# Altium PCB StepperControllerPCB.PcbDoc
Units mm, origin at the board's own origin, x right, y up, seen from the top; angles counter-clockwise.
Board outline 48.64 x 60.07 mm, 2 copper layers (Top Layer, Bottom Layer); 13 components, 26 nets, 92 pads, 2 vias.
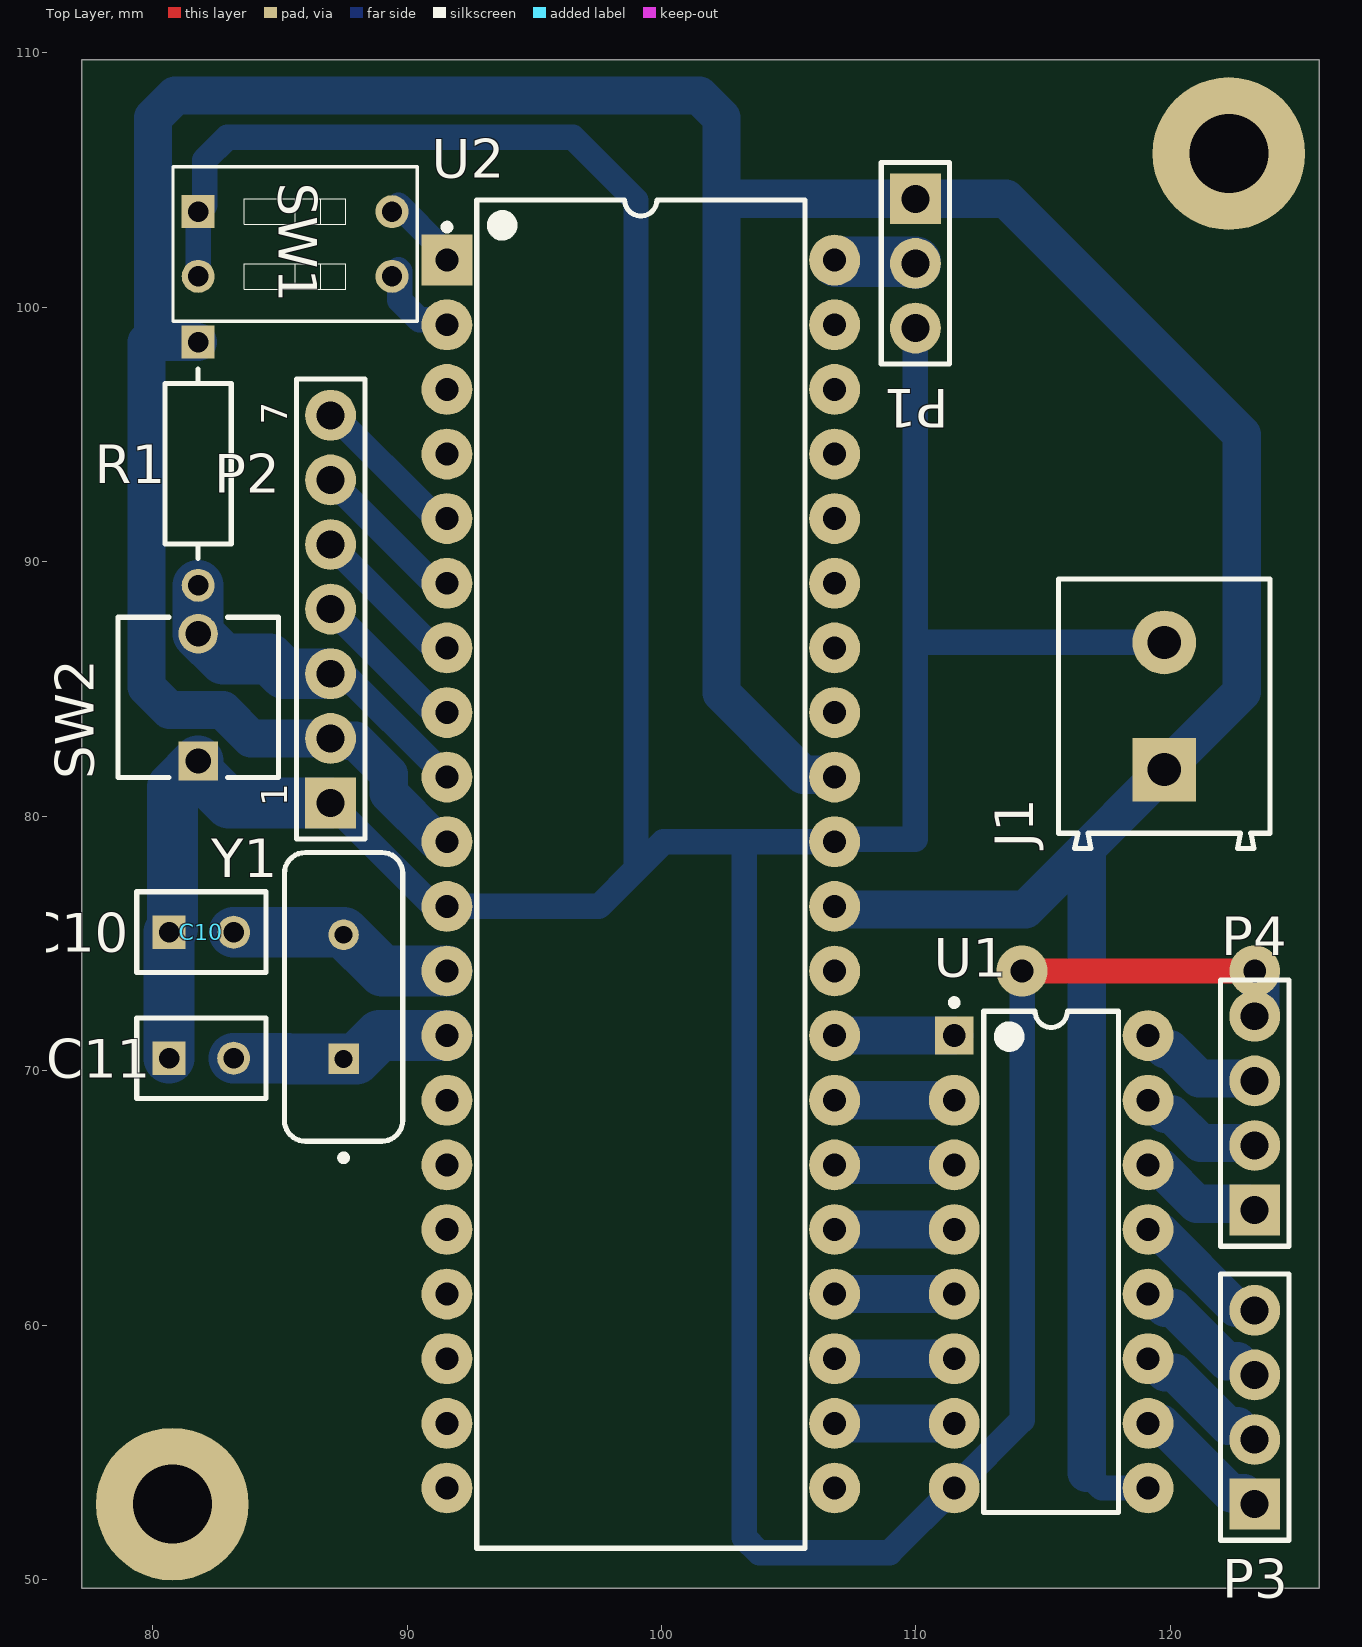
[diagram p0: Top Layer view]
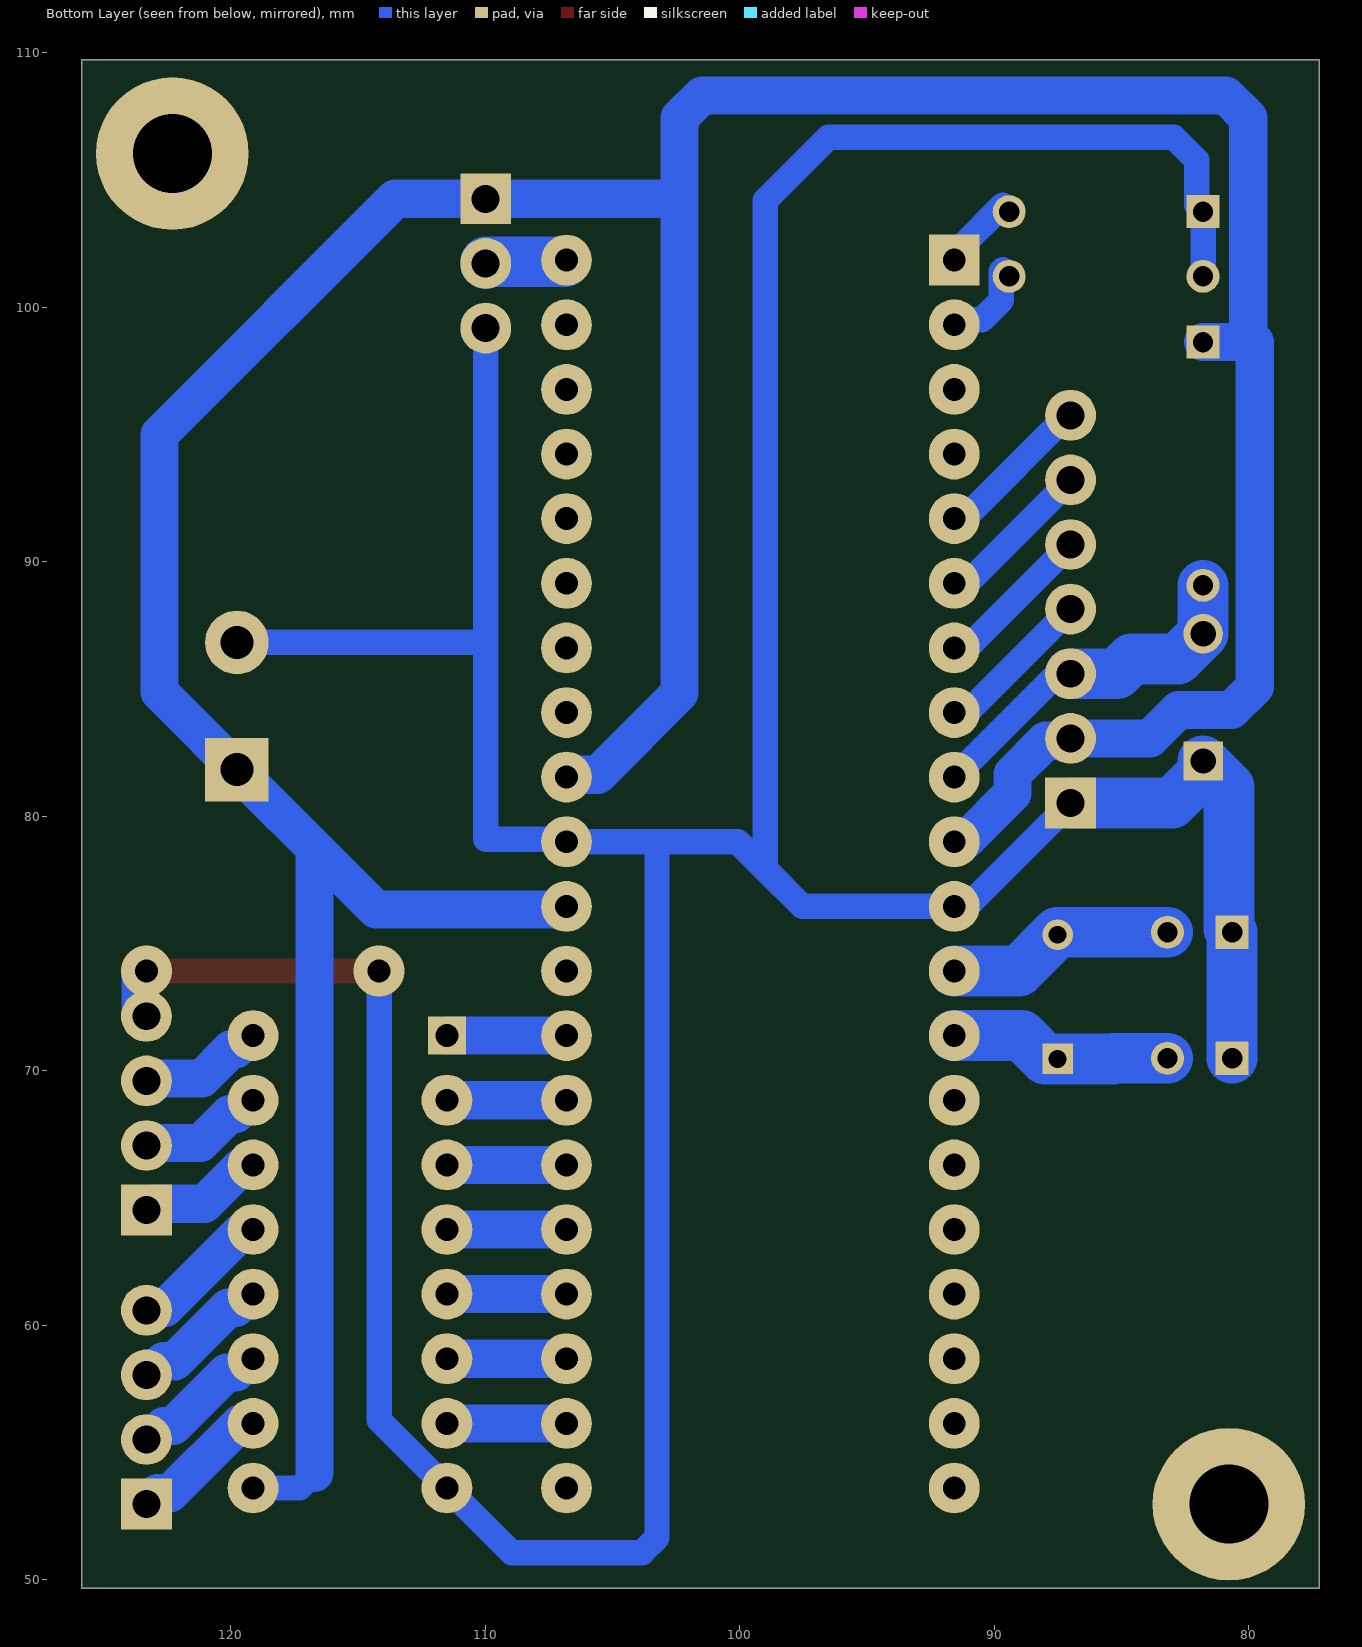
[diagram p1: Bottom Layer view, seen from below]
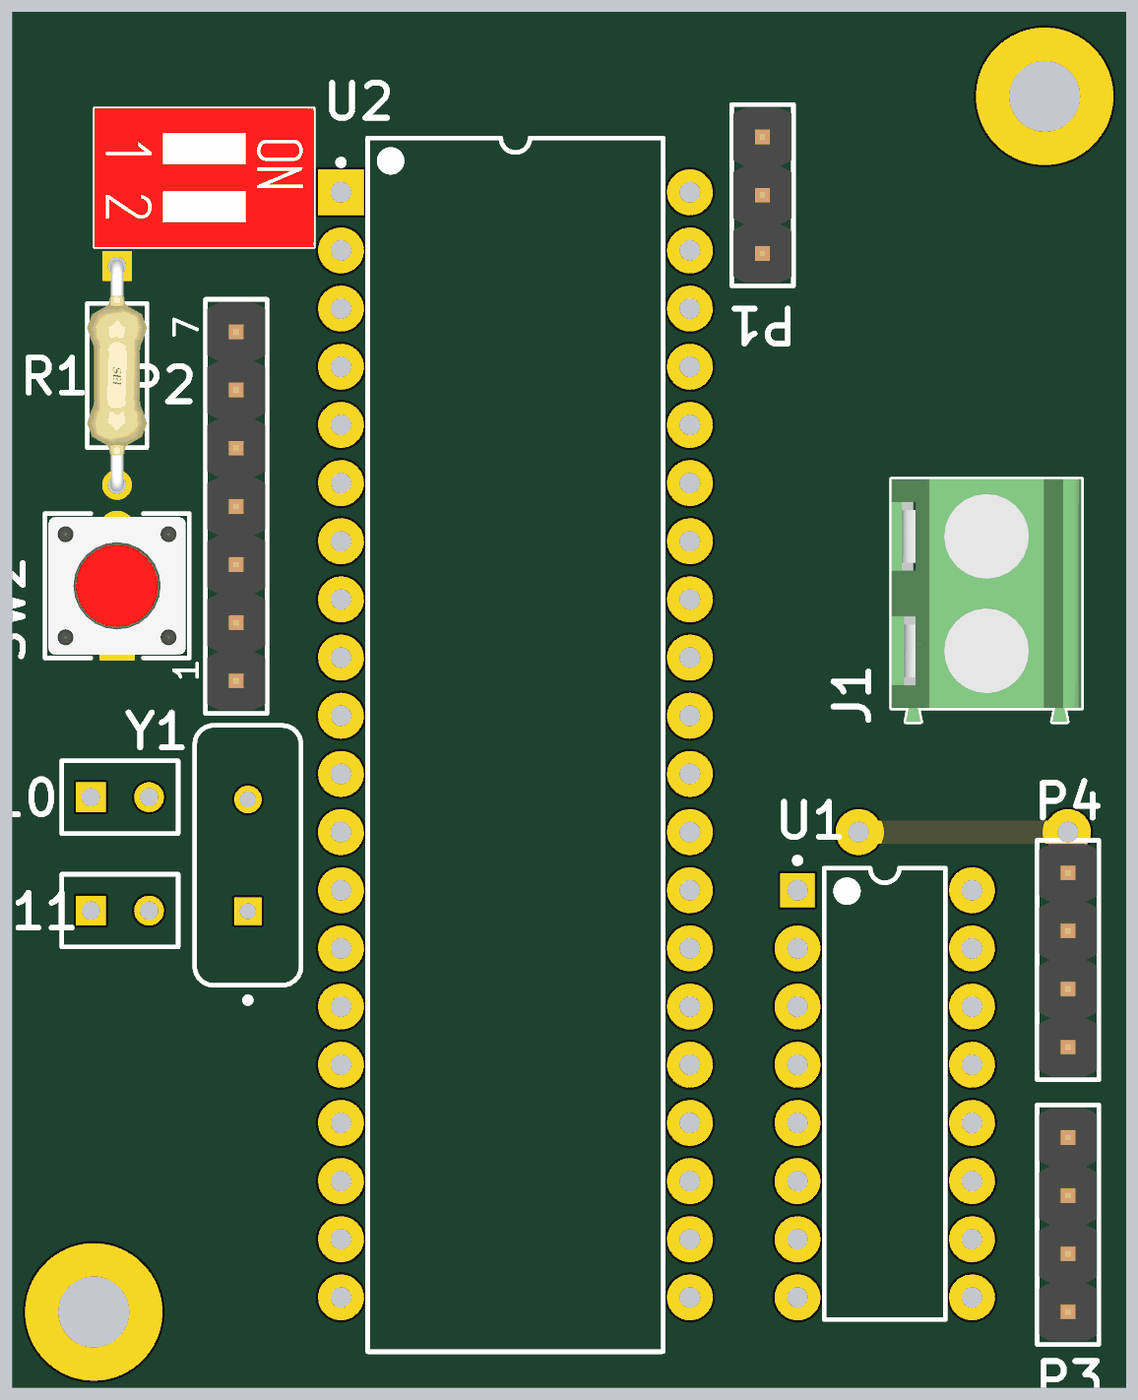
[diagram p2: 3D render of the assembled board from above, using the file's embedded part models]

## Layer stack, top to bottom
Top Solder: solder mask 0.0102, Solder Resist, Dk 3.5
Top Layer: signal copper 0.0356
Dielectric 1: dielectric 0.32, FR-4, Dk 4.8
Bottom Layer: signal copper 0.0356
Bottom Solder: solder mask 0.0102, Solder Resist, Dk 3.5

## Board outline
77.216,49.657 125.857,49.657 125.857,109.728 77.216,109.728

## Design rules (kind name [scope] priority, off if disabled: settings)
Clearance [All] p1: gap=0.254 ignorepadtopadclearanceinfootprint=FALSE except(0: Arc-Hole Track-Hole SMDPad-Hole THPad-Hole Via-Hole Fill-Hole Poly-Hole Region-Hole Text-Hole; 1: Arc-Fill Arc-Poly Arc-Region Track-Fill Track-Poly Track-Region THPad-Fill THPad-Poly THPad-Region)
PlaneClearance [All] p1: clearance=10
PolygonConnect [All] p1: connectstyle=Relief reliefconductorwidth=0.5 reliefentries=4 polygonreliefangle="90 Angle" airgapwidth=0.254
RoutingVias [All] p1: holewidth=0.711 width=1.27 viastyle="Through Hole" minholewidth=0.711 minwidth=1.27 maxholewidth=0.711 maxwidth=1.27
SolderMaskExpansion [All] p1: expansion=0.102 istentingtop=FALSE
Width [All] p1: maxlimit=4 minlimit=1 preferedwidth=3 minimp=50.000000 maximp=50.000000 favimp=50.000000
29 further rules are at their usual default settings.

## Components (designator, comment, footprint, x,y, rotation, side; value= is the part's Value field where it differs from the comment)
C10 "" CAPR51-254-508X318X736 81.915,75.438 r0 top
C11 "" CAPR51-254-508X318X736 81.915,70.485 r0 top
J1 "691213710002" 691213710002 119.761,84.328 r90 top
P1 "61300311121" 61300311121 109.982,101.727 r270 top
P2 "61300711121" 61300711121 86.995,88.138 r90 top
P3 "61300411121" 61300411121 123.317,56.769 r90 top
P4 "61300411121" 61300411121 123.317,68.326 r90 top
R1 "" FP-CF14-MFG 81.788,93.853 r270 top
SW1 "" 418117270902 85.598,102.489 r270 top
SW2 "EVQ-21505R" FP-EVQ-21505R-MFG 81.788,84.669 r90 top
U1 "ULN2003A" STM-DIP-16L 115.316,62.484 r0 top
U2 "ATmega32-16PU" 40P6 99.187,77.724 r0 top
Y1 "" FOX-FOXSLF160-20 87.503,72.898 r90 top

## Footprints (in the part's own frame and the unit in brackets; to place one, negate y for a bottom-side part, rotate by r counter-clockwise, add the part's x,y. Pads: shape width x height; smd on the part's side, far side on the other; paste and mask are expansions set on the pad)
40P6 [mm] "40-Pin Ceramic Dual In-Line Package (CerDIP)"
  rect 2x2 hole 0.9: 1(-7.62,24.13)
  round 2 hole 0.9: 2(-7.62,21.59) 3(-7.62,19.05) 4(-7.62,16.51) 5(-7.62,13.97) 6(-7.62,11.43) 7(-7.62,8.89) 8(-7.62,6.35) 9(-7.62,3.81) 10(-7.62,1.27) 11(-7.62,-1.27) 12(-7.62,-3.81) 13(-7.62,-6.35) 14(-7.62,-8.89) 15(-7.62,-11.43) 16(-7.62,-13.97) 17(-7.62,-16.51) 18(-7.62,-19.05) 19(-7.62,-21.59) 20(-7.62,-24.13) 21(7.62,-24.13) 22(7.62,-21.59) 23(7.62,-19.05) 24(7.62,-16.51) 25(7.62,-13.97) 26(7.62,-11.43) 27(7.62,-8.89) 28(7.62,-6.35) 29(7.62,-3.81) 30(7.62,-1.27) 31(7.62,1.27) 32(7.62,3.81) 33(7.62,6.35) 34(7.62,8.89) 35(7.62,11.43) 36(7.62,13.97) 37(7.62,16.51) 38(7.62,19.05) 39(7.62,21.59) 40(7.62,24.13)
  silkscreen extent -7.74,-26.5 6.45,26.5, body extent -7.05,-26.47 7.05,26.47, height 5.72
61300311121 [mm] "Pin Header, pitch 2.54 mm, THT, Vertical, single row, 3p"
  rect 2x2 hole 1.1: 1(-2.54,0)
  round 2 hole 1.1: 2(0,0) 3(2.54,0)
  silkscreen extent -3.96,-1.35 3.96,1.35, body extent -3.81,-1.27 3.81,1.27, height 8.57
61300411121 [mm] "Pin Header, pitch 2.54 mm, THT, Vertical, single row, 4p"
  rect 2x2 hole 1.1: 1(-3.81,0)
  round 2 hole 1.1: 2(-1.27,0) 3(1.27,0) 4(3.81,0)
  silkscreen extent -5.23,-1.35 5.23,1.35, body extent -5.08,-1.27 5.08,1.27, height 8.57
61300711121 [mm] "Pin Header, pitch 2.54 mm, THT, Vertical, single row, 7p"
  rect 2x2 hole 1.1: 1(-7.62,0)
  round 2 hole 1.1: 2(-5.08,0) 3(-2.54,0) 4(0,0) 5(2.54,0) 6(5.08,0) 7(7.62,0)
  silkscreen extent -9.04,-1.35 9.04,1.35, body extent -8.89,-1.27 8.89,1.27, height 8.57
418117270902 [mm] "02p, 2.54mm Pitch, Horizontal, Box Type, THT, raised Actuator, red, without Tape, Tube"
  rect 1.3x1.3 hole 0.8: 1(-1.27,-3.81)
  round 1.3 hole 0.8: 2(1.27,-3.81) 3(1.27,3.81) 4(-1.27,3.81)
  silkscreen extent -3.04,-4.8 3.04,4.8, body extent -3.04,-4.8 3.04,4.8, height 6.5
691213710002 [mm] "5,00mm - modular - green - Horizontal entry with rising cage clamp -  10,0mm height - 02p"
  rect 2.5x2.5 hole 1.3: 1(-2.5,0)
  round 2.5 hole 1.3: 2(2.5,0)
  silkscreen extent -5.6,-4.15 5,4.15, body extent -5.6,-4.15 5,4.15, height 10.05
CAPR51-254-508X318X736 [mm] "THD, 2-Leads, Body 5.08x3.18mm"
  rect 1.3x1.3 hole 0.8: 1(-1.27,0)
  round 1.3 hole 0.8: 2(1.27,0)
  silkscreen extent -2.54,-1.59 2.54,1.59, body extent -2.54,-1.59 2.54,1.59, height 7.36
FOX-FOXSLF160-20 [mm] "THD, 2-Leads, Body 11.35x4.65mm"
  rect 1.2x1.2 hole 0.7: 1(-2.44,0)
  round 1.2 hole 0.7: 2(2.44,0)
  silkscreen extent -6.45,-2.32 5.68,2.32, body extent -5.67,-2.32 5.68,2.33, height 3.6
FP-CF14-MFG [mm]
  rect 1.3x1.3 hole 0.8 paste-1000 mask+0: 1(-4.78,0)
  round 1.3 hole 0.8 paste-1000 mask+0: 2(4.78,0)
  silkscreen extent -3.73,-1.3 3.73,1.3, body extent -5.53,-1.4 5.53,1.4, height 0.25
FP-EVQ-21505R-MFG [mm]
  rect 1.55x1.55 hole 1 paste-1000 mask+0: A(-2.5,0)
  round 1.55 hole 1 paste-1000 mask+0: B(2.5,0)
  silkscreen extent -3.15,-3.15 3.15,3.15, body extent -3.37,-3.25 3.37,3.25, height 0.25
STM-DIP-16L [mm] "DIP, 16-Leads, Body 19.7x7.1mm, Pitch 2.54mm"
  rect 1.5x1.5 hole 0.9: 1(-3.81,8.89)
  round 2 hole 0.9: 2(-3.81,6.35) 3(-3.81,3.81) 4(-3.81,1.27) 5(-3.81,-1.27) 6(-3.81,-3.81) 7(-3.81,-6.35) 8(-3.81,-8.89) 9(3.81,-8.89) 10(3.81,-6.35) 11(3.81,-3.81) 12(3.81,-1.27) 13(3.81,1.27) 14(3.81,3.81) 15(3.81,6.35) 16(3.81,8.89)
  silkscreen extent -3.93,-9.85 2.65,10.31, body extent -3.95,-9.85 3.95,9.85, height 5.33

## Part data
C10 C11: library part CMP-1664-00004-1, "Radial Leaded Multilayer Ceramic Capacitor, 0.1 uF, +/- 10%, 50 V, -55 to 125 degC, 2-Pin THD, RoHS, Tape and Reel", Case\Package=SOT-23-5, Dropout Voltage="260 mV", Max Input Voltage="8 V", Max Operating Temperature="85 degC", Max Power Dissipation="250 mW", Min Operating Temperature="-40 degC", Output Current="150 mA", Output Voltage="5 V", Package Quantity=3000, ComponentLink1Description="Manufacturer URL", ComponentLink1URL=http://www.kemet.com/, ComponentLink2Description=Datasheet, ComponentLink2URL=http://www.kemet.com/docfinder?Partnumber=C320C104K5R5TA, DatasheetVersion=Dec-15, Height="1.3 mm", Length="3 mm", Mount="Surface Mount", Outputs=1, PackageDescription="2-Pin Through Hole Device, Body 5.08 x 3.18 mm, Pitch 2.54 mm", PackageReference=CAPR51-254-508X318X736, Packaging="Tape and Reel", Pins=5, Radiation Hardening=No, RoHSCompliant=true, Width="1.8 mm"
J1: library part CMP-1502-02526-1, "Serie 213 - 5.00 mm Horizontal Entry Modular with RisingCage Clamp WR-TBL, 2 pin", Manufacturer="Wurth Elektronik", Operating Temperature=-40to105degC, Datasheet URL=http://katalog.we-online.de/em/datasheet/6912137100xx.pdf, Manufacturer URL=http://www.we-online.de, Mounting Technology=THT, Package Reference=691213710002, Packaging=Box, Part Number=691213710002, Pin Number=2, Pitch=5.00mm, Publisher=WurthElektronik
P1: library part CMP-1502-01062-1, "THT Vertical Pin Header WR-PHD, Pitch 2.54 mm, Single Row, 3 pins", Contact Resistance=20mOhm, Manufacturer="Wurth Elektronik", Operating Temperature=-40to105degC, Rated Current=3A, Withstanding Voltage=500VAC, Working Voltage=250VAC, Datasheet URL=https://katalog.we-online.de/em/datasheet/6130xx11121.pdf, Gender=Male, Manufacturer URL=http://www.we-online.de, Mounting Technology=THT, Orientation=Vertical, Package Reference=61300311121, Packaging=Bag, Part Number=61300311121, Pin Number=3, Pitch=2.54mm, Publisher=WurthElektronik, Row Number=Single
P2: library part CMP-1502-01074-1, "THT Vertical Pin Header WR-PHD, Pitch 2.54 mm, Single Row, 7 pins", Contact Resistance=20mOhm, Manufacturer="Wurth Elektronik", Operating Temperature=-40to105degC, Rated Current=3A, Withstanding Voltage=500VAC, Working Voltage=250VAC, Datasheet URL=https://katalog.we-online.de/em/datasheet/6130xx11121.pdf, Gender=Male, Manufacturer URL=http://www.we-online.de, Mounting Technology=THT, Orientation=Vertical, Package Reference=61300711121, Packaging=Bag, Part Number=61300711121, Pin Number=7, Pitch=2.54mm, Publisher=WurthElektronik, Row Number=Single
P3 P4: library part CMP-1502-01064-1, "THT Vertical Pin Header WR-PHD, Pitch 2.54 mm, Single Row, 4 pins", Contact Resistance=20mOhm, Manufacturer="Wurth Elektronik", Operating Temperature=-40to105degC, Rated Current=3A, Withstanding Voltage=500VAC, Working Voltage=250VAC, Datasheet URL=https://katalog.we-online.de/em/datasheet/6130xx11121.pdf, Gender=Male, Manufacturer URL=http://www.we-online.de, Mounting Technology=THT, Orientation=Vertical, Package Reference=61300411121, Packaging=Bag, Part Number=61300411121, Pin Number=4, Pitch=2.54mm, Publisher=WurthElektronik, Row Number=Single
R1: library part CMP-26528-000003-1, "RES 7.5K OHM 1/4W 5% AXIAL", Case/Package=Axial, Max Operating Temperature=155°C, Max Power Dissipation=250mW, Min Operating Temperature=-55°C, Resistance=7.5kR, Resistor Type="Carbon Film", Temperature Coefficient=-400ppm/°C, Tolerance=5%, Contact Plating=Tin, Diameter=2.3mm, Features="Flame Retardant Coating", Lead Free="Lead Free", Length=0.256inch, Mount="Through Hole", Number of Terminations=2, Packaging="Tape and Reel", Power Rating=250mW, Radiation Hardening=No, RoHS Compliant=Yes, Series=CF
SW1: library part CMP-1435-00002-1, "WS-DITV 2.54 mm Compact THT Dip Switch with Raised Actuator", Manufacturer="Wuerth Elektronik", PartNumber=418117270902, ComponentLink1Description="Manufacturer URL", ComponentLink1URL=http://www.we-online.com, ComponentLink2Description=Datasheet, ComponentLink2URL=http://katalog.we-online.de/em/datasheet/4181172709xx.pdf, NoPins=4, PackageReference=418117270902
SW2: library part CMP-05618-000118-1, "SWITCH TACTILE SPST-NO 0.02A 15V", Actuator Color=Red, Case/Package=Radial, Contact Current Rating=20mA, Contact Resistance=50mR, Max Operating Temperature=70°C, Max Voltage Rating (DC)=15V, Min Operating Temperature=-20°C, Operating Force=1.6N, Package Quantity=1, Actuator Length=1.6mm, Actuator Type=Standard, Contact Plating=Silver, Current Rating=20mA, Depth=6mm, Electrical Life=100000Cycles, Height=5mm, Illumination Type=Non-Illuminated, Lead Free="Lead Free", Length=6mm, Max Current Rating=20mA, Mechanical Life=100000Cycles, Mount="Through Hole", Orientation=Straight, Packaging="Tape and Reel", Series=EVQ2, Size=6mm, Switch Function=Off-Mom, Switch Travel=0.25mm, Termination="PC Pin", Throw Configuration=SPST, Voltage Rating (DC)=15V, Width=6mm
U1: library part CMP-2000-07351-1, "Seven Darlington Array, 50 V, 0.5 A, -40 to 85 degC, 16-Pin DIP, RoHS, Tube", Collector Emitter Voltage V(br)ceo=50V, DC Collector Current=500mA, DC Current Gain hFE=1000hFE, Manufacturer=STMicroelectronics, Operating Temperature Max=85°C, Output Current=0.5A, Package Description="16-Pin DIP, Body 19.7 x 7.1 mm, Pitch 2.54 mm", Package Reference=DIP-16L, Power Dissipation Pd=-, Transistor Case Style=DIP, Automotive Qualification Standard=-, Datasheet URL=http://www2.st.com/content/ccc/resource/technical/document/datasheet/f3/6e/c8/64/4d/b3/4e/38/CD00001244.pdf/files/CD00001244.pdf/jcr:content/translations/en.CD00001244.pdf, Datasheet Version="Rev. 8, 06/2012", Manufacturer URL=http://www.st.com/, Mounting Technology=ThroughHole, MSL=MSL2-1year, No. of Pins=16Pins, PartNumber=ULN2003A, Product Range=-, SVHC=NoSVHC(17-Dec-2015), Transistor Polarity=NPN, VOUT=50V
U2: library part CMP-0095-00359-1, "8-bit AVR Microcontroller, 4.5-5.5V, 16MHz, 32KB Flash, 1024 Bytes EEPROM, 2KB SRAM, 40-pin PDIP, Industrial Grade (-40°C to 85°C)", Code_JEDEC=MS-011-AC, ComponentLink1Description="Manufacturer URL", ComponentLink1URL=http://www.atmel.com/, ComponentLink2Description="ATmega32(L) Datasheet", ComponentLink2URL=http://atmel.com/dyn/resources/prod_documents/doc2503.pdf, ComponentLink3Description="ATmega32(L) Summary", ComponentLink3URL=http://atmel.com/dyn/resources/prod_documents/2503S.pdf, DatasheetVersion="revQ, Feb-2011", PackageDescription="40-lead (0.600\"/15.24mm Wide) Plastic Dual Inline Package (PDIP)", PackageReference=40P6, PackageVersion="revB, Sep-2001"
Y1: library part CMP-1749-00003-1, "Resistance Weld Thru-Hole Crystal, 16 MHz, -20 to 70 degC, 2-Pin THD, RoHS, Bulk", Case\Package=Axial, Max Operating Temperature="155 degC", Min Operating Temperature="-55 degC", Package Quantity=200, Power Rating="250 mW", Resistance="221 kohm", Tolerance=1%, Voltage Rating="250 V", ComponentLink1Description="Manufacturer URL", ComponentLink1URL=http://www.foxonline.com/, ComponentLink2Description=Datasheet, ComponentLink2URL=http://www.foxonline.com/pdfs/hc49slf.pdf, DatasheetVersion=Mar-15, Length="0.248 inch", Mount="Through Hole", PackageDescription="2-Pin Through Hole Device, Body 11.35 x 4.65 mm", PackageReference=FOXSLF160-20, Packaging=Bulk, RoHSCompliant=true

## Free pads (board coordinates)
  round 6 hole 3.1: 2(80.772,52.959) 2(122.301,106.045)

## Via types
v1: diameter 2, hole 0.9, Top Layer to Bottom Layer, 2 vias

## Nets (pads, with @x,y where several pads share a name; then routed paths per layer and width w, separated by ;. In a path a pad name is that pad's centre, name@x,y a point inside that pad or via, vN(x,y) a via of type N, cw(c..) or ccw(c..) an arc to the next point about the centre after c; other vN are vias at no path point)
+5: J1.1 P1.1 P2.2 R1.1 U1.9 U2.10 U2.30 U2.32 | length 171.5
  Bottom Layer w1: 102.362,104.394 102.489,104.267 ; U2.30 106.903,76.358 107.256,76.358 U2.30@107.288,76.327 ; 116.713,54.18 117.299,53.594 U1.9
  Bottom Layer w1.5: 80.01,98.679 80.01,107.452 80.889,108.331 101.483,108.331 102.362,107.452 102.362,104.394 102.362,84.836 105.568,81.63 106.711,81.63 U2.32 ; R1.1 79.756,98.633 79.756,85.08 80.663,84.173 82.754,84.173 83.869,83.058 P2.2 87.091,82.962 87.971,82.962 89.281,81.652 89.281,80.899 91.09,79.09 91.471,79.09 U2.10 ; 102.489,104.267 P1.1 113.538,104.267 122.809,94.996 122.809,84.876 J1.1@119.286,81.353 ; U2.30@107.288,76.327 114.3,76.327 116.522,78.549 J1.1@119.286,81.313 ; 116.713,54.18 116.713,78.359
Bit1: SW1.4 U2.1 | length 2.9
  Bottom Layer w1: SW1.4@89.662,104.013 91.317,102.358 91.317,102.104 U2.1
Bit2: SW1.3 U2.2 | length 3.5
  Bottom Layer w1: SW1.3@89.662,101.473 89.719,101.416 89.719,100.273 90.487,99.505 91.376,99.505 U2.2
GND: C10.1 C11.1 J1.2 P1.3 P2.1 P4.4 SW1.1 SW1.2 SW2.A U1.8 U2.11 U2.31 | length 192
  Top Layer w1: v1(114.173,73.914) v1(123.317,73.914)
  Bottom Layer w1: SW1.2 SW1.1 ; SW1.1@82.042,104.013 82.042,105.791 82.931,106.68 96.52,106.68 98.996,104.203 98.996,77.915 ; P2.1@86.741,80.772 91.059,76.454 U2.11 97.536,76.454 98.996,77.915 ; P1.3 109.982,86.995 ; v1(114.173,73.914) 114.173,56.261 U1.8 108.966,51.054 103.837,51.054 103.251,51.64 103.251,78.74 102.997,78.994 ; J1.2 110.149,86.828 109.982,86.995 ; 98.996,77.915 100.076,78.994 102.997,78.994 ; 102.997,78.994 U2.31 106.903,79.09 109.982,79.09 109.982,86.995
  Bottom Layer w1.5: P4.4 123.317,72.163 123.549,72.395 123.549,73.682 v1(123.317,73.914)
  Bottom Layer w2: C11.1 C10.1 80.772,75.565 80.772,81.153 SW2.A ; SW2.A@82.078,81.443 83.004,80.518 P2.1
NetC10_2: C10.2 U2.12 Y1.2 | length 9
  Bottom Layer w2: C10.2 87.503,75.438 89.027,73.914 U2.12
NetC11_2: C11.2 U2.13 Y1.1 | length 8.8
  Bottom Layer w2: C11.2 85.317,70.485 85.344,70.458 87.998,70.458 88.914,71.374 U2.13
NetP1_2: P1.2 U2.40 | length 3.2
  Bottom Layer w1: U2.40 U2.40@106.87,101.79
  Bottom Layer w2: U2.40@106.87,101.79 P1.2@109.982,101.79
NetP2_3: P2.3 R1.2 SW2.B U2.9 | length 13.9
  Bottom Layer w1: P2.3@87.249,85.852 U2.9
  Bottom Layer w2: R1.2 SW2.B 82.78,86.177 84.598,86.177 85.177,85.598 P2.3
NetP2_4: P2.4 U2.8 | length 6.1
  Bottom Layer w1: P2.4@87.11,88.023 90.963,84.17 91.471,84.17 U2.8
NetP2_5: P2.5 U2.7 | length 6.3
  Bottom Layer w1: P2.5 90.868,86.805 91.376,86.805 U2.7
NetP2_6: P2.6 U2.6 | length 6.3
  Bottom Layer w1: P2.6 90.963,89.25 91.471,89.25 U2.6
NetP2_7: P2.7 U2.5 | length 6.3
  Bottom Layer w1: P2.7@86.995,95.885 91.09,91.79 91.471,91.79 U2.5
NetP3_1: P3.1 U1.10 | length 5.5
  Bottom Layer w1.5: U1.10 119.642,56.134 122.39,53.386 122.89,53.386 P3.1
NetP3_2: P3.2 U1.11 | length 5.5
  Bottom Layer w1.5: U1.11 119.261,58.674 119.797,58.138 120.162,58.138 122.265,56.035 122.646,56.035 123.182,55.499 P3.2
NetP3_3: P3.3 U1.12 | length 5.5
  Bottom Layer w1.5: U1.12 119.261,61.214 119.797,60.678 120.102,60.678 122.205,58.575 122.646,58.575 123.182,58.039 P3.3
NetP3_4: P3.4 U1.13 | length 5.5
  Bottom Layer w1.5: U1.13 119.222,63.658 119.603,63.658 122.586,60.675 123.221,60.675 P3.4
NetP4_1: P4.1 U1.14 | length 4.9
  Bottom Layer w1.5: U1.14 119.222,66.198 119.603,66.198 121.035,64.766 123.067,64.766 P4.1
NetP4_2: P4.2 U1.15 | length 4.9
  Bottom Layer w1.5: U1.15 119.261,68.834 119.797,68.298 120.051,68.298 121.197,67.152 123.221,67.152 P4.2
NetP4_3: P4.3 U1.16 | length 4.9
  Bottom Layer w1.5: U1.16 119.261,71.374 119.797,70.838 119.992,70.838 121.138,69.692 123.221,69.692 P4.3
NetU1_1: U1.1 U2.28 | length 4.7
  Bottom Layer w1.5: U2.28 U1.1
NetU1_2: U1.2 U2.27 | length 4.7
  Bottom Layer w1.5: U2.27 U1.2
NetU1_3: U1.3 U2.26 | length 4.7
  Bottom Layer w1.5: U2.26 U1.3
NetU1_4: U1.4 U2.25 | length 4.7
  Bottom Layer w1.5: U2.25 U1.4
NetU1_5: U1.5 U2.24 | length 4.7
  Bottom Layer w1.5: U2.24 U1.5
NetU1_6: U1.6 U2.23 | length 4.7
  Bottom Layer w1.5: U2.23 U1.6
NetU1_7: U1.7 U2.15 U2.16 U2.17 U2.18 U2.22 | length 4.7
  Bottom Layer w1.5: U2.22 U1.7
pads on no net: U2.3 U2.4 U2.14 U2.19 U2.20 U2.21 U2.29 U2.33 U2.34 U2.35 U2.36 U2.37 U2.38 U2.39

## Polygon pours and split planes (outlines as drawn)
GND on Bottom Layer "NONET_L02_P001" (solid, shelved, pour order 1): 77.216,49.657 125.857,49.657 125.857,109.728 77.216,109.728

## Text inside footprints (layer, text, board x,y; h text height)
P2: Top Overlay "7" at 85.295,95.378 h1.02 r90; Top Overlay "1" at 85.295,80.398 h1.02 r90